# Allegro board Main_v1.4.brd
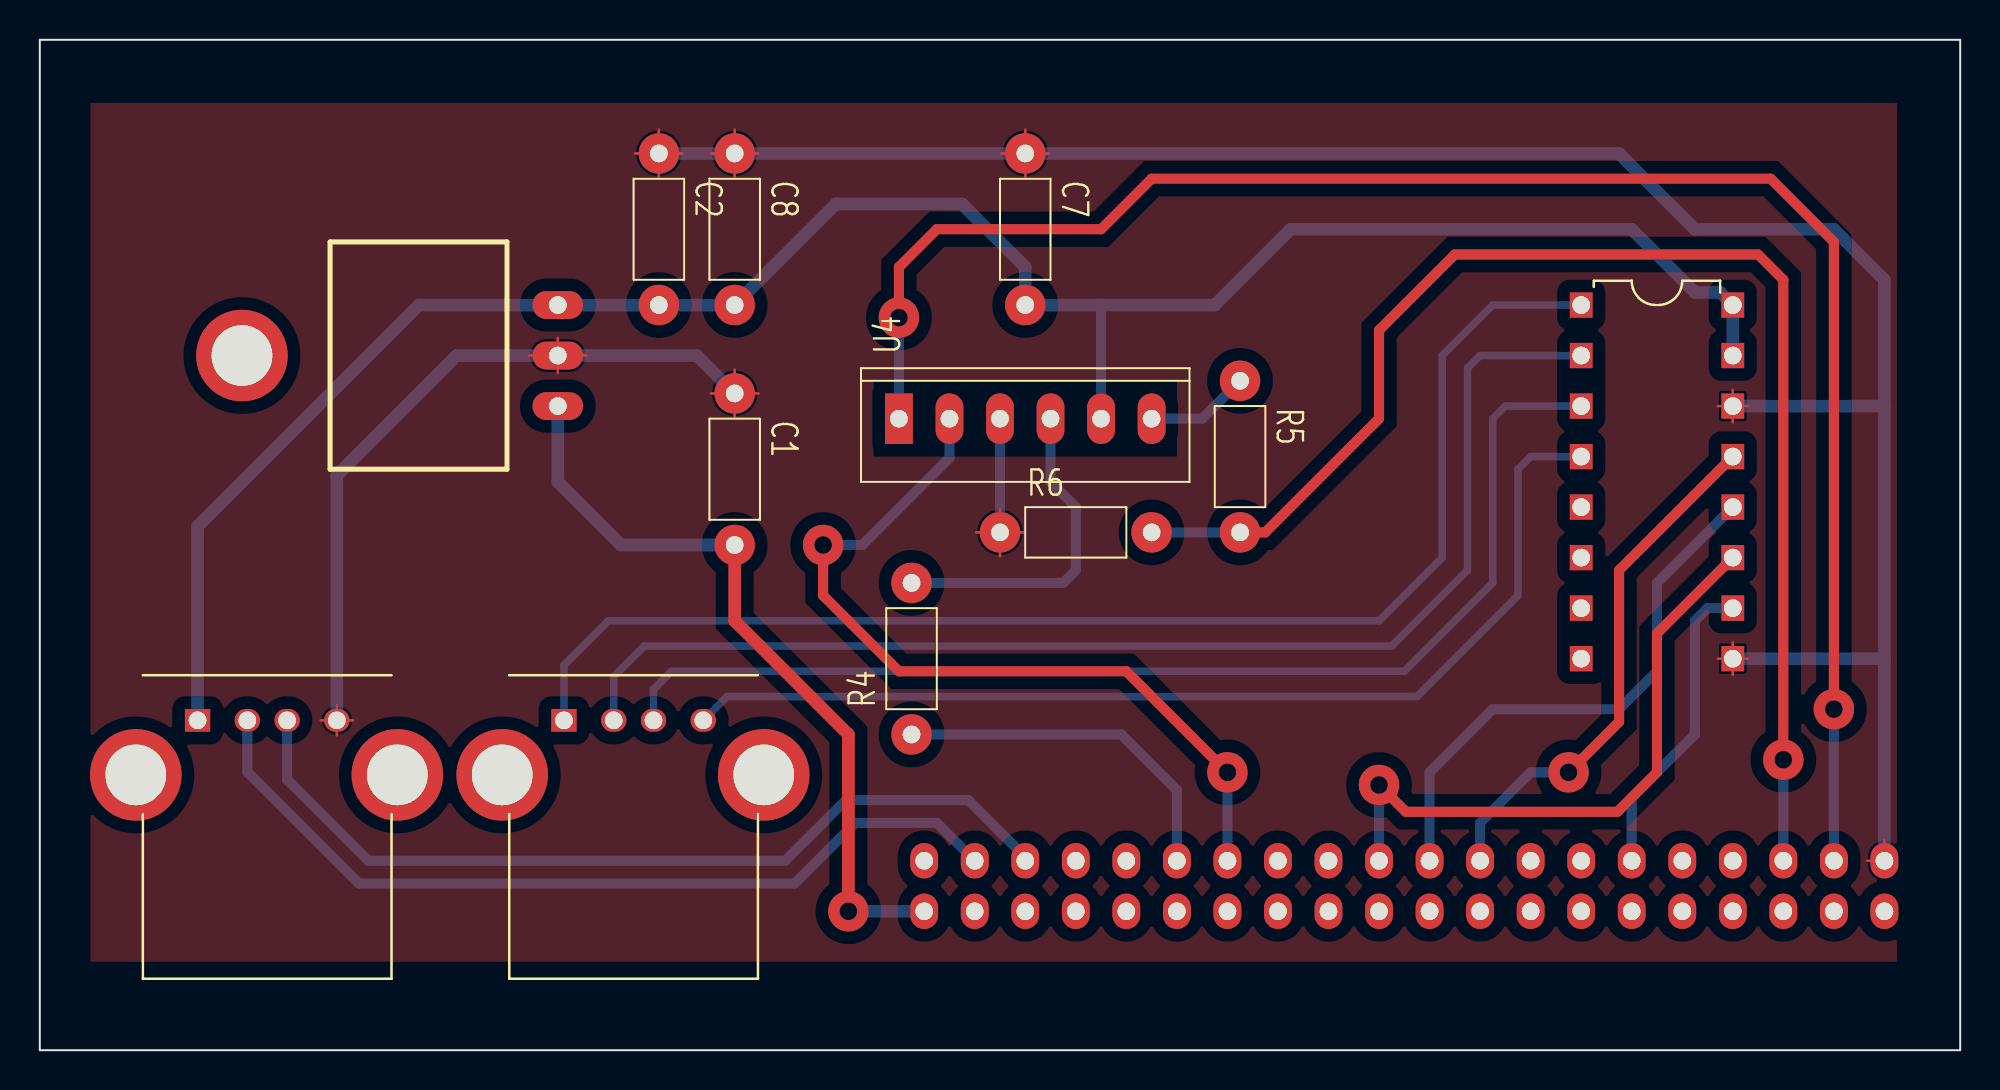
[diagram p0: board, top side]
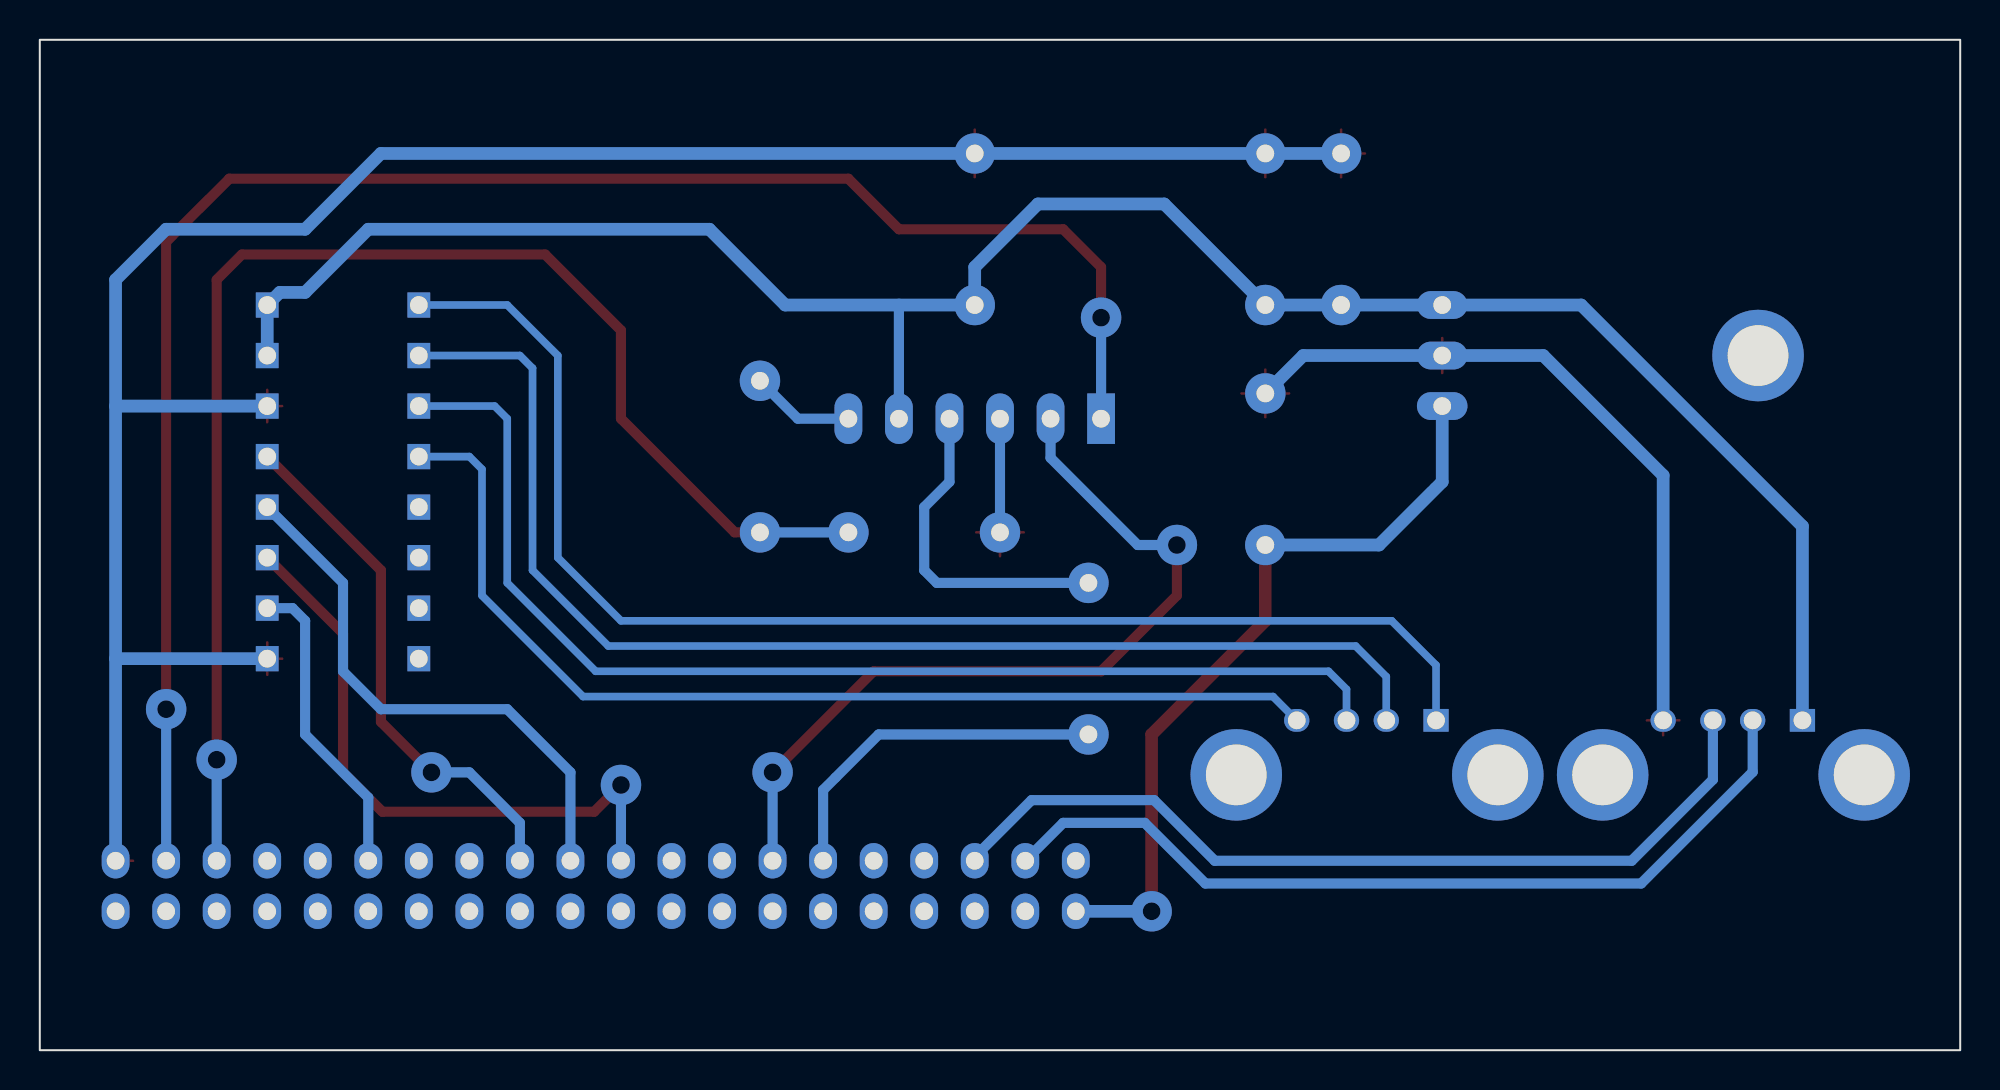
[diagram p1: board, bottom side, seen from below]

Outline 96.52 x 50.8 mm; copper layers: TOP, BOTTOM. Coordinates in mm from the lower left corner of the outline.
Outline path: rectangle 0,0 96.52,50.8

## Design rules (mm)
constraint set DEFAULT: min track width 0.127

## Placement (name value [footprint] x y rotation side)
C1  0.1u  [GU-RC300]  34.92 33.02 270 top
C2  10u  [GU-RC300]  31.11 45.08 270 top
C7  200p  [GU-RC300]  49.53 45.08 270 top
C8  0.1u  [GU-RC300]  34.92 45.08 270 top
J2  Pi Connector  [20_PIN_HEADER]  82.55 -15.88 90 top
J3  4 HEADER  [MOLEX]  29.84 15.87 0 top
J4  4 HEADER  [MOLEX]  11.43 15.87 0 top
R4  51  [GU-RC300]  43.81 15.87 90 top
R5  51  [GU-RC300]  60.32 33.66 270 top
R6  100k  [GU-RC300]  48.26 26.04 0 top
U1  LM2937/TO220  [TO-220]  23.49 34.92 90 top
U4  SPH0645LM4H-B  [GU-MOLEX6]  43.18 31.75 90 top
U5  MCP3008-I/P  [DIP16-254-192X762MM]  81.28 28.57 270 top

## Library data of the parts
C1 C2 C7 C8 = C
J2 = HEADER 20X2_0
J3 J4 = 4 HEADER
R4-R6 = R
U1 = LM2937/TO220_0
U4 = SPH0645LM4H-B
U5 = MCP3008-I/P_0

## Footprints (pads in the part's own frame, mm; a bottom-side part is the same pattern mirrored in y, then rotated)
20_PIN_HEADER
  oval 1.778x1.397 hole 0.889: 1(22.86,38.1) 2(25.4,38.1) 3(22.86,35.56) 4(25.4,35.56) 5(22.86,33.02) 6(25.4,33.02) 7(22.86,30.48) 8(25.4,30.48) 9(22.86,27.94) 10(25.4,27.94) 11(22.86,25.4) 12(25.4,25.4) 13(22.86,22.86) 14(25.4,22.86) 15(22.86,20.32) 16(25.4,20.32) 17(22.86,17.78) 18(25.4,17.78) 19(22.86,15.24) 20(25.4,15.24) 21(22.86,12.7) 22(25.4,12.7) 23(22.86,10.16) 24(25.4,10.16) 25(22.86,7.62) 26(25.4,7.62) 27(22.86,5.08) 28(25.4,5.08) 29(22.86,2.54) 30(25.4,2.54) 31(22.86,0) 32(25.4,0) 33(22.86,-2.54) 34(25.4,-2.54) 35(22.86,-5.08) 36(25.4,-5.08) 37(22.86,-7.62) 38(25.4,-7.62) 39(22.86,-10.16) 40(25.4,-10.16)
DIP16-254-192X762MM
  rect 1.27x1.143 hole 0.889: 1(-8.89,-3.81) 2(-6.35,-3.81) 3(-3.81,-3.81) 4(-1.27,-3.81) 5(1.27,-3.81) 6(3.81,-3.81) 7(6.35,-3.81) 8(8.89,-3.81) 9(8.89,3.81) 10(6.35,3.81) 11(3.81,3.81) 12(1.27,3.81) 13(-1.27,3.81) 14(-3.81,3.81) 15(-6.35,3.81) 16(-8.89,3.81)
GU-MOLEX6
  rect 2.54x1.397 hole 0.889: 1(0,0)
  oval 2.54x1.397 hole 0.889: 2(0,-2.54) 3(0,-5.08) 4(0,-7.62) 5(0,-10.16) 6(0,-12.7)
GU-RC300
  round 2.032 hole 0.889: 1(0,0) 2(7.62,0)
MOLEX
  round 4.6 hole 3.05: (-6.604,-2.032) (6.54,-2.032)
  rect 1.27x1.143 hole 0.889: 1(-3.5,0.71)
  oval 1.27x1.143 hole 0.889: 2(-1,0.71) 3(1,0.71) 4(3.5,0.71)
TO-220
  round 4.6 hole 3.05: (0,13.335)
  oval 1.397x2.54 hole 0.889: 1(-2.54,-2.54) 2(0,-2.54) 3(2.54,-2.54)

## Nets
3.3V: C2.2 C7.2 C8.2 J4.1 U1.3(OUT) U4.5 U5.15(VREF) U5.16
GND: C1.1 C2.1 C7.1 C8.1 J2.40 J4.4 R6.1 U1.2 U4.3 U5.9 U5.14
BCLK: R4.2 U4.4
DOUT: J2.36 R5.2 R6.2
MISO: J2.22 U5.12
MOSI: J2.20 U5.11
NOT_CS: J2.30 U5.10
PIN2_5V: C1.2 J2.1 U1.1
PIN4_5V: J2.3
SCL: J2.6 J4.3
SCLK: J2.24 U5.13
SDA: J2.4 J4.2
SEL: J2.14 U4.2
WS: J2.38 U4.1(WS)
N51205: J2.12 R4.1
N51557: R5.1 U4.6
N57219: J3.1 U5.1
N57223: J3.2 U5.2
N57227: J3.3 U5.3
N57231: J3.4 U5.4

Pads without a net: J2 2 5 7 8 9 10 11 13 15 16 17 18 19 21 23 25 26 27 28 29 31 32 33 34 35 37 39; U5 5 6 7 8

## Via types
v1: diameter 2.032, hole 0.889, TOP to BOTTOM, 8 vias

## Routing (per net, layer and track width the routed paths; a pad name or vN(x,y) marks a point on that pad's centre or on a via; arc(x,y) is an arc through that point)
3.3V: length 108.3
  BOTTOM w0.508: U4.5 53.34,37.46
  BOTTOM w0.635: U5.15 85.09,37.46 84.45,38.1 83.19,38.1 80.01,41.27 62.86,41.27 59.05,37.46 C7.2 49.53,39.37 46.35,42.55 40,42.55 C8.2 C2.2 19.05,37.46 7.93,26.34 J4.1
GND: length 189.8
  TOP w0.127: 47.07,26.04 R6.1 ; R6.1 49.45,26.04 ; R6.1 48.26,24.84 ; R6.1 48.26,27.23 ; U5.9 85.09,20.5 ; U5.9 84.34,19.68 ; U5.9 85.84,19.68 ; U5.9 85.09,18.87 ; 33.73,33.02 C1.1 ; C1.1 34.92,31.83 ; C1.1 36.12,33.02 ; C1.1 34.92,34.21 ; U5.14 85.09,33.2 ; U5.14 85.84,32.38 ; U5.14 84.34,32.38 ; U5.14 85.09,31.57 ; C7.1 49.53,46.28 ; C7.1 50.72,45.08 ; C7.1 49.53,43.89 ; C7.1 48.34,45.08 ; U1.2 27.48,34.92 ; U1.2 24.59,34.92 ; U1.2 26.03,34.05 ; U1.2 26.03,35.8 ; C8.1 34.92,46.28 ; C8.1 34.92,43.89 ; C8.1 33.73,45.08 ; C8.1 36.12,45.08 ; J4.4 14.93,17.33 ; J4.4 15.74,16.58 ; J4.4 14.12,16.58 ; J4.4 14.93,15.84 ; C2.1 31.11,46.28 ; C2.1 31.11,43.89 ; C2.1 29.92,45.08 ; C2.1 32.31,45.08 ; 91.83,9.52 J2.40 92.71,10.59
  BOTTOM w0.508: U4.3 R6.1
  BOTTOM w0.635: C1.1 33.02,34.92 U1.2 20.95,34.92 14.93,28.9 J4.4 ; U5.9 92.71,19.68 ; 92.71,19.68 92.71,32.38 ; 92.71,19.68 J2.40 ; C2.1 C8.1 C7.1 79.38,45.08 83.19,41.27 90.17,41.27 92.71,38.73 92.71,32.38 ; U5.14 92.71,32.38
BCLK: length 16.7
  BOTTOM w0.508: 43.81,23.49 51.43,23.49 52.07,24.13 52.07,27.3 50.8,28.57 U4.4
DOUT: length 69.9
  TOP w0.508: R5.2 61.59,26.04 67.31,31.75 67.31,36.2 71.12,40 86.36,40 87.63,38.73 v1(87.63,14.6)
  BOTTOM w0.508: R6.2 R5.2 ; v1(87.63,14.6) J2.36
MISO: length 27.8
  BOTTOM w0.508: U5.12 81.28,23.49 81.28,19.05 79.38,17.14 73.03,17.14 69.85,13.97 J2.22
MOSI: length 31.5
  TOP w0.508: U5.11 81.28,20.95 81.28,13.97 79.3,11.99 68.66,11.99 v1(67.31,13.33)
  BOTTOM w0.508: v1(67.31,13.33) 67.31,9.52
NOT_CS: length 15.5
  BOTTOM w0.508: 85.09,22.22 83.82,22.22 83.19,21.59 83.19,15.87 80.01,12.7 J2.30
PIN2_5V: length 38.6
  TOP w0.635: C1.2 34.92,21.59 40.64,15.87 v1(40.64,6.98)
  BOTTOM w0.635: v1(40.64,6.98) 44.45,6.98 ; C1.2 29.21,25.4 26.03,28.57 U1.1
SCL: length 44.4
  BOTTOM w0.508: 49.53,9.52 49.53,9.72 46.67,12.57 40.51,12.57 37.46,9.52 16.51,9.52 12.43,13.61 J4.3
SCLK: length 26.7
  TOP w0.508: v1(76.83,13.97) 79.38,16.51 79.38,24.13 U5.13
  BOTTOM w0.508: J2.24 72.39,11.43 74.93,13.97 v1(76.83,13.97)
SDA: length 43.5
  BOTTOM w0.508: 46.99,9.52 45.09,11.43 40.99,11.43 37.94,8.38 16.04,8.38 10.43,13.99 J4.2
SEL: length 41.1
  TOP w0.508: v1(39.37,25.4) 39.37,22.86 43.18,19.05 54.61,19.05 v1(59.69,13.97)
  BOTTOM w0.508: v1(59.69,13.97) 59.69,9.52 ; v1(39.37,25.4) 41.34,25.4 45.72,29.78 U4.2
WS: length 88.9
  TOP w0.508: v1(43.18,36.83) 43.18,39.37 45.09,41.27 53.34,41.27 55.88,43.81 87,43.81 90.17,40.64 v1(90.17,17.14)
  BOTTOM w0.508: v1(90.17,17.14) J2.38 ; U4.1 v1(43.18,36.83)
N51205: length 18
  BOTTOM w0.508: R4.1 54.36,15.87 57.15,13.08 57.15,9.52
N51557: length 5.2
  BOTTOM w0.508: R5.1 58.42,31.75 U4.6
N57219: length 67.4
  BOTTOM w0.381: J3.1 26.34,19.36 28.57,21.59 67.31,21.59 70.48,24.76 70.48,34.92 73.03,37.46 77.47,37.46
N57223: length 63.5
  BOTTOM w0.381: U5.2 72.39,34.92 71.75,34.29 71.75,24.13 67.94,20.32 30.39,20.32 28.85,18.78 J3.2
N57227: length 58.9
  BOTTOM w0.381: U5.3 73.66,32.38 73.03,31.75 73.03,23.49 68.58,19.05 31.75,19.05 30.84,18.14 J3.3
N57231: length 53.3
  BOTTOM w0.381: J3.4 34.54,17.78 69.22,17.78 74.3,22.86 74.3,29.21 74.93,29.84 U5.4

## Copper pours and planes (outline as drawn; the poured copper is in the pictures)
GND on TOP: 2.54,4.45 2.54,47.62 93.34,47.62 93.34,4.45
